# Altium PCB PCB_proj_module_1_1.PcbDoc (part 7 of 9)
Units mm, origin at the board's own origin, x right, y up, seen from the top; angles counter-clockwise.
Board outline 413 x 280 mm, 4 copper layers (Top Layer, Signal Layer 1, Signal Layer 2, Bottom Layer), stack 0.778 mm thick; 1054 components, 639 nets, 3181 pads, 673 vias.
Unrouted connection lines stored in the file: 570.
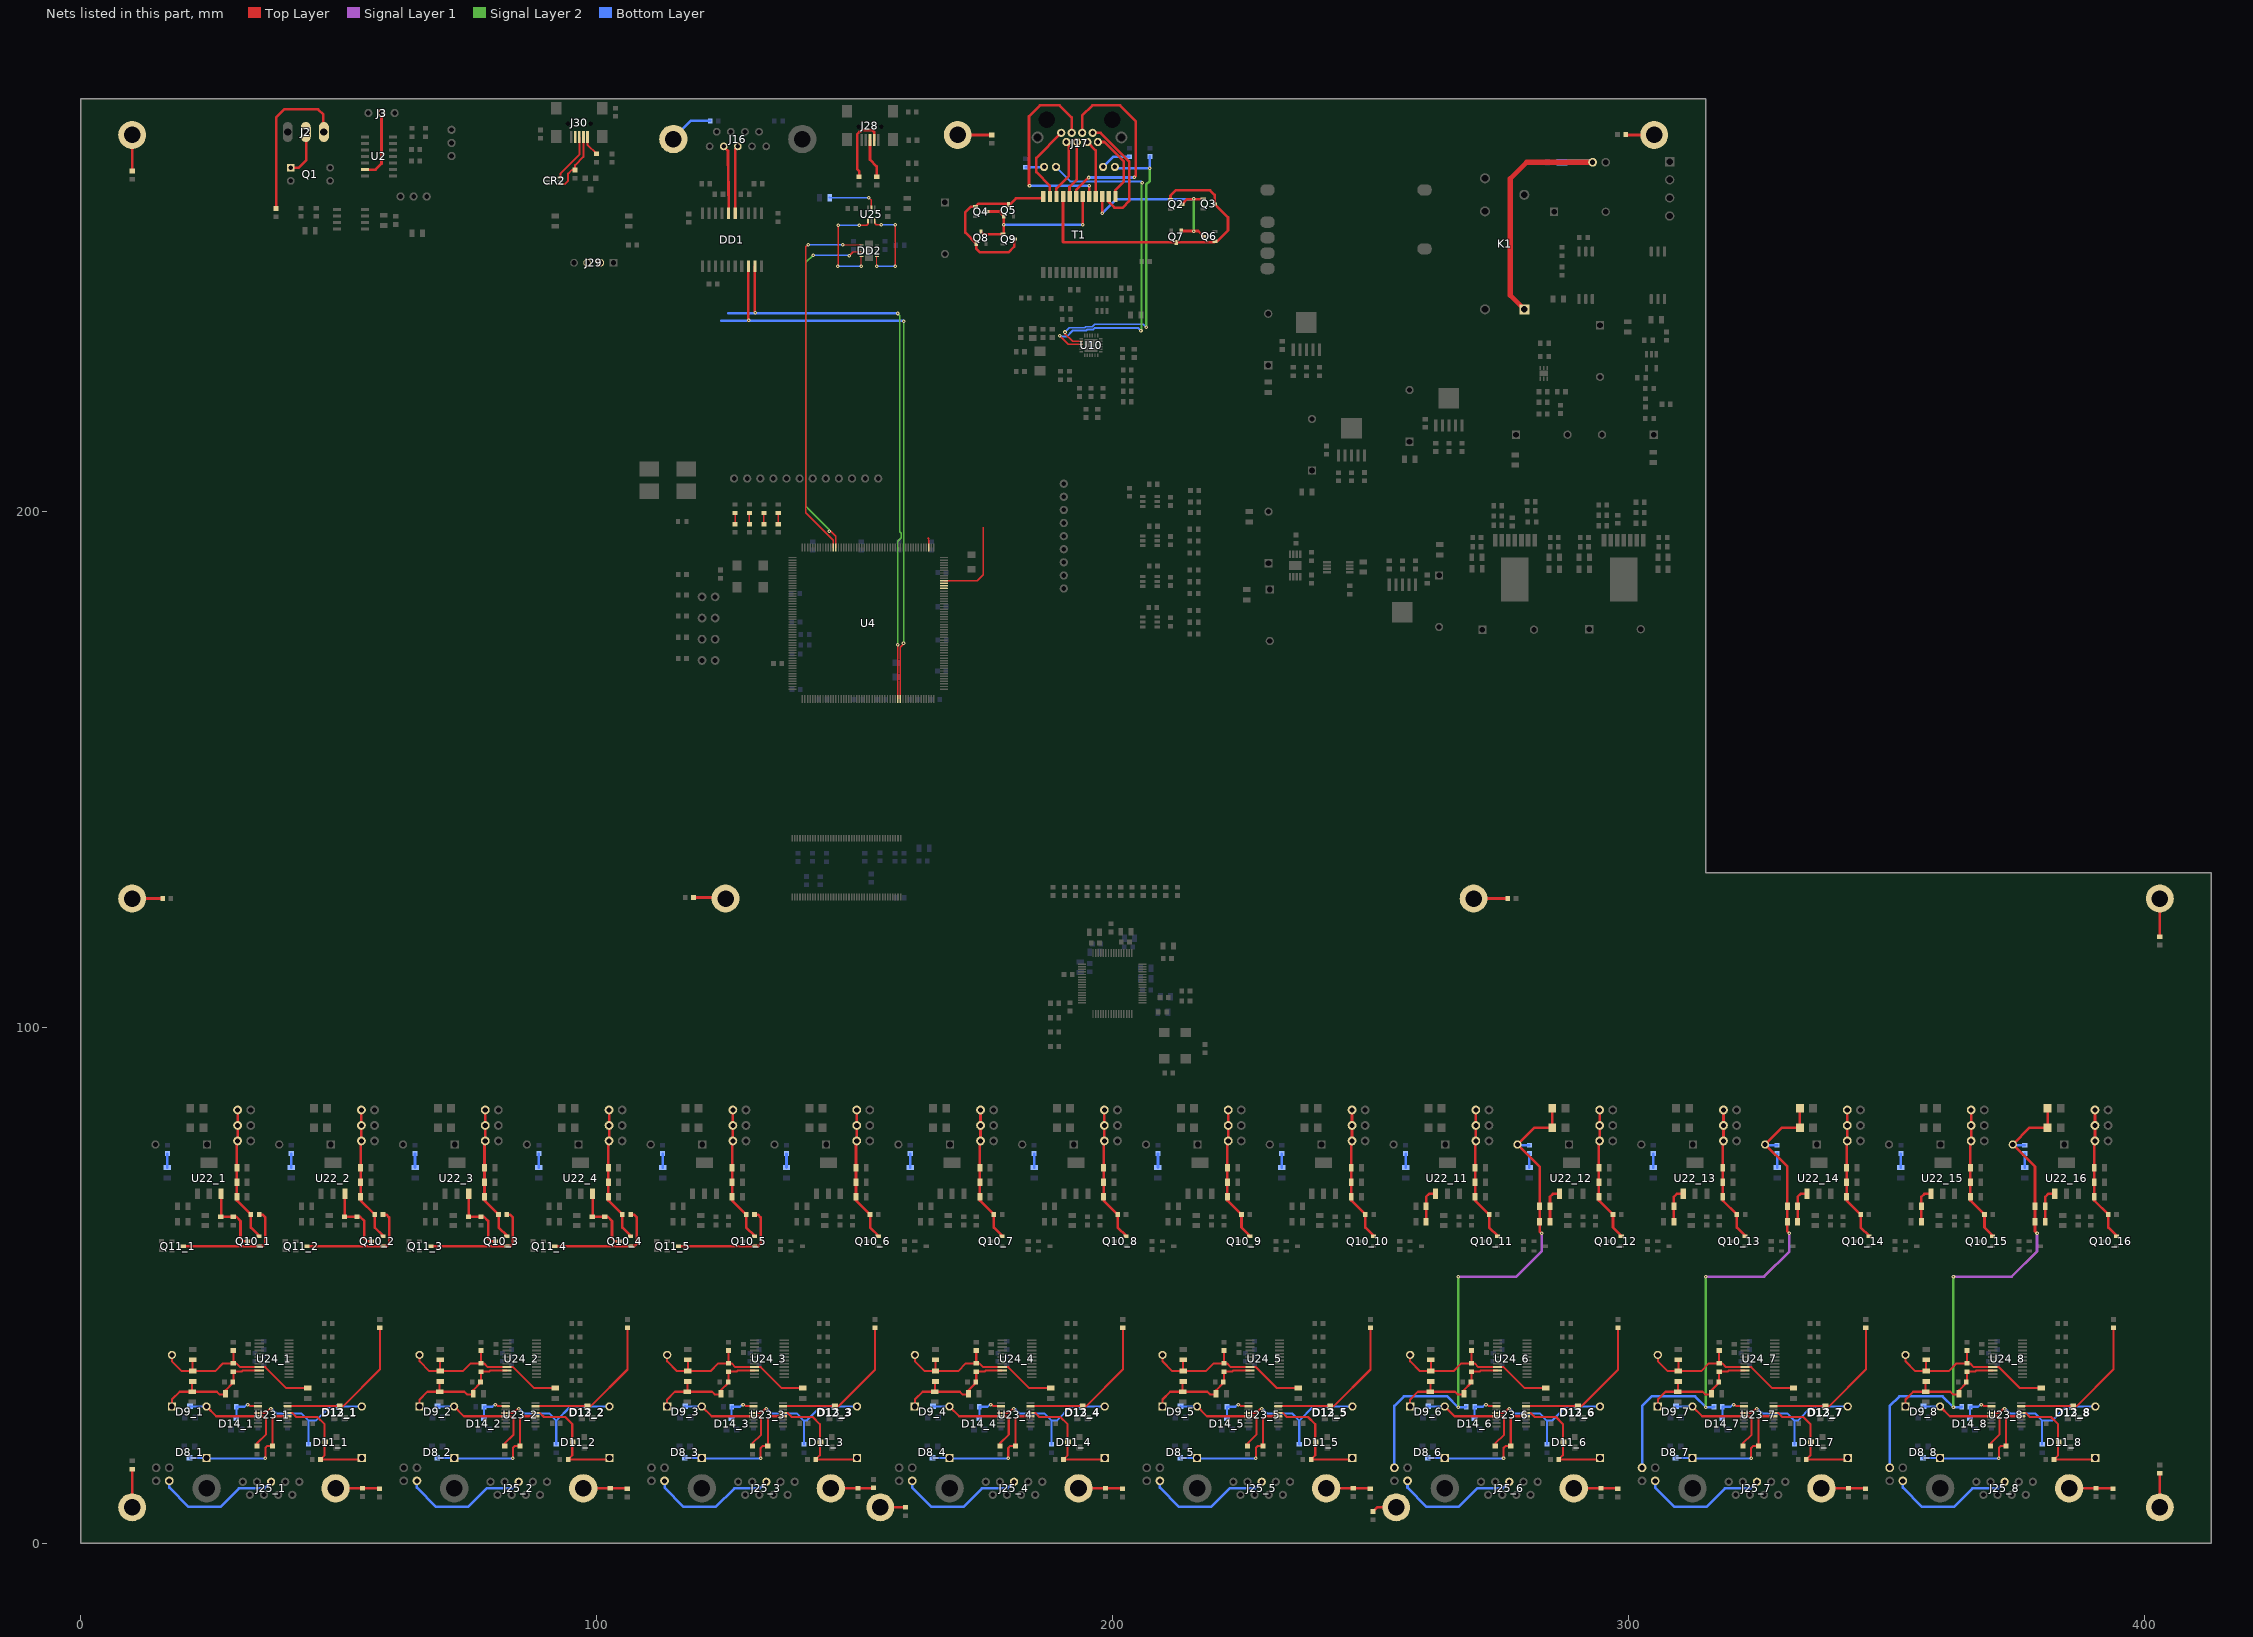
[diagram p8: the nets of this part, all layers, seen from the top]

## Via types
v1: diameter 0.7, hole 0.3, Top Layer to Bottom Layer, tented both sides, 659 vias
v2: diameter 1, hole 0.5, Top Layer to Bottom Layer, tented both sides, 12 vias
v3: diameter 0.66, hole 0.33, Top Layer to Bottom Layer, 2 vias

## Nets (pads, with @x,y where several pads share a name; then routed paths per layer and width w, separated by ;. In a path a pad name is that pad's centre, name@x,y a point inside that pad or via, vN(x,y) a via of type N, cw(c..) or ccw(c..) an arc to the next point about the centre after c; other vN are vias at no path point) (continued)
NetC148_11_2: C148_11.2 R3_11.2 U22_11.1 | length 6.9
  Top Layer w0.5: R3_11.2@260.8,62.4 C148_11.2@260.8,65.4 260.8,67.2 261.37,67.77 U22_11.1@262.63,67.77
NetC148_12_1: C148_12.1 J27_6.2 R1_12.1 R2_12.1 R3_12.1 R117_12.2 R132_6.1 TP11_12.2 | length 108
  Top Layer w0.5: v1(283.2,60.1) 282.8,60.5 R3_12.1@282.8,62.4 C148_12.1@282.8,65.4 282.8,73.02 TP11_12.2@278.5,77.32 281.764,80.584 285.123,80.584 285.25,80.711 R1_12.1@285.25,84.334
  Signal Layer 1 w0.5: v1(267,51.7) 278.3,51.7 283.2,56.6 v1(283.2,60.1)
  Signal Layer 2 w0.5: v1(267,26.4) v1(267,51.7)
  Bottom Layer w0.5: J27_6.2@254.6,14.724 J27_6.2@254.648,14.676 254.648,26.648 256.5,28.5 264.9,28.5 v1(267,26.4) 268.5,26.4 R132_6.1@268.6,26.5 ; TP11_12.2@278.5,77.32 278.65,77.17 R117_12.2@280.82,77.17
NetC148_12_2: C148_12.2 R3_12.2 U22_12.1 | length 6.9
  Top Layer w0.5: R3_12.2@284.8,62.4 C148_12.2@284.8,65.4 284.8,67.2 285.37,67.77 U22_12.1@286.63,67.77
NetC148_13_2: C148_13.2 R3_13.2 U22_13.1 | length 6.9
  Top Layer w0.5: R3_13.2@308.8,62.4 C148_13.2@308.8,65.4 308.8,67.2 309.37,67.77 U22_13.1@310.63,67.77
NetC148_14_1: C148_14.1 J27_7.2 R1_14.1 R2_14.1 R3_14.1 R117_14.2 R132_7.1 TP11_14.2 | length 108
  Top Layer w0.5: v1(331.2,60.1) 330.8,60.5 R3_14.1@330.8,62.4 C148_14.1@330.8,65.4 330.8,73.02 TP11_14.2@326.5,77.32 329.764,80.584 333.123,80.584 333.25,80.711 R1_14.1@333.25,84.334
  Signal Layer 1 w0.5: v1(315,51.7) 326.3,51.7 331.2,56.6 v1(331.2,60.1)
  Signal Layer 2 w0.5: v1(315,26.4) v1(315,51.7)
  Bottom Layer w0.5: J27_7.2@302.6,14.724 J27_7.2@302.648,14.676 302.648,26.648 304.5,28.5 312.9,28.5 v1(315,26.4) 316.5,26.4 R132_7.1@316.6,26.5 ; TP11_14.2@326.5,77.32 326.65,77.17 R117_14.2@328.82,77.17
NetC148_14_2: C148_14.2 R3_14.2 U22_14.1 | length 6.9
  Top Layer w0.5: R3_14.2@332.8,62.4 C148_14.2@332.8,65.4 332.8,67.2 333.37,67.77 U22_14.1@334.63,67.77
NetC148_15_2: C148_15.2 R3_15.2 U22_15.1 | length 6.9
  Top Layer w0.5: R3_15.2@356.8,62.4 C148_15.2@356.8,65.4 356.8,67.2 357.37,67.77 U22_15.1@358.63,67.77
NetC148_16_1: C148_16.1 J27_8.2 R1_16.1 R2_16.1 R3_16.1 R117_16.2 R132_8.1 TP11_16.2 | length 108
  Top Layer w0.5: v1(379.2,60.1) 378.8,60.5 R3_16.1@378.8,62.4 C148_16.1@378.8,65.4 378.8,73.02 TP11_16.2@374.5,77.32 377.764,80.584 381.123,80.584 381.25,80.711 R1_16.1@381.25,84.334
  Signal Layer 1 w0.5: v1(363,51.7) 374.3,51.7 379.2,56.6 v1(379.2,60.1)
  Signal Layer 2 w0.5: v1(363,26.4) v1(363,51.7)
  Bottom Layer w0.5: J27_8.2@350.6,14.724 J27_8.2@350.648,14.676 350.648,26.648 352.5,28.5 360.9,28.5 v1(363,26.4) 364.5,26.4 R132_8.1@364.6,26.5 ; TP11_16.2@374.5,77.32 374.65,77.17 R117_16.2@376.82,77.17
NetC148_16_2: C148_16.2 R3_16.2 U22_16.1 | length 6.9
  Top Layer w0.5: R3_16.2@380.8,62.4 C148_16.2@380.8,65.4 380.8,67.2 381.37,67.77 U22_16.1@382.63,67.77
NetC149_1_2: C149_1.2 R117_1.1 | length 2.7
  Bottom Layer w0.5: C149_1.2@16.82,72.87 R117_1.1@16.82,75.57
NetC149_2_2: C149_2.2 R117_2.1 | length 2.7
  Bottom Layer w0.5: C149_2.2@40.82,72.87 R117_2.1@40.82,75.57
NetC149_3_2: C149_3.2 R117_3.1 | length 2.7
  Bottom Layer w0.5: C149_3.2@64.82,72.87 R117_3.1@64.82,75.57
NetC149_4_2: C149_4.2 R117_4.1 | length 2.7
  Bottom Layer w0.5: C149_4.2@88.82,72.87 R117_4.1@88.82,75.57
NetC149_5_2: C149_5.2 R117_5.1 | length 2.7
  Bottom Layer w0.5: C149_5.2@112.82,72.87 R117_5.1@112.82,75.57
NetC149_6_2: C149_6.2 R117_6.1 | length 2.7
  Bottom Layer w0.5: C149_6.2@136.82,72.87 R117_6.1@136.82,75.57
NetC149_7_2: C149_7.2 R117_7.1 | length 2.7
  Bottom Layer w0.5: C149_7.2@160.82,72.87 R117_7.1@160.82,75.57
NetC149_8_2: C149_8.2 R117_8.1 | length 2.7
  Bottom Layer w0.5: C149_8.2@184.82,72.87 R117_8.1@184.82,75.57
NetC149_9_2: C149_9.2 R117_9.1 | length 2.7
  Bottom Layer w0.5: C149_9.2@208.82,72.87 R117_9.1@208.82,75.57
NetC149_10_2: C149_10.2 R117_10.1 | length 2.7
  Bottom Layer w0.5: C149_10.2@232.82,72.87 R117_10.1@232.82,75.57
NetC149_11_2: C149_11.2 R117_11.1 | length 2.7
  Bottom Layer w0.5: C149_11.2@256.82,72.87 R117_11.1@256.82,75.57
NetC149_12_2: C149_12.2 R117_12.1 | length 2.7
  Bottom Layer w0.5: C149_12.2@280.82,72.87 R117_12.1@280.82,75.57
NetC149_13_2: C149_13.2 R117_13.1 | length 2.7
  Bottom Layer w0.5: C149_13.2@304.82,72.87 R117_13.1@304.82,75.57
NetC149_14_2: C149_14.2 R117_14.1 | length 2.7
  Bottom Layer w0.5: C149_14.2@328.82,72.87 R117_14.1@328.82,75.57
NetC149_15_2: C149_15.2 R117_15.1 | length 2.7
  Bottom Layer w0.5: C149_15.2@352.82,72.87 R117_15.1@352.82,75.57
NetC149_16_2: C149_16.2 R117_16.1 | length 2.7
  Bottom Layer w0.5: C149_16.2@376.82,72.87 R117_16.1@376.82,75.57
NetC150_1_2: C150_1.2 J25_1.10 R120_1.2 | length 8.3
  Top Layer w0.508: J25_1.10@49.417,10.686 C150_1.2@54.382,10.686 ; C150_1.2@54.656,10.706 R120_1.2@57.95,10.706
NetC150_2_2: C150_2.2 J25_2.10 R120_2.2 | length 8.3
  Top Layer w0.508: J25_2.10@97.417,10.686 C150_2.2@102.382,10.686 ; C150_2.2@102.656,10.706 R120_2.2@105.95,10.706
NetC150_3_2: C150_3.2 J25_3.10 R120_3.2 | length 8.3
  Top Layer w0.508: J25_3.10@145.417,10.686 C150_3.2@150.382,10.686 ; C150_3.2@150.656,10.706 R120_3.2@153.95,10.706
NetC150_4_2: C150_4.2 J25_4.10 R120_4.2 | length 8.3
  Top Layer w0.508: J25_4.10@193.417,10.686 C150_4.2@198.382,10.686 ; C150_4.2@198.656,10.706 R120_4.2@201.95,10.706
NetC150_5_2: C150_5.2 J25_5.10 R120_5.2 | length 8.3
  Top Layer w0.508: J25_5.10@241.417,10.686 C150_5.2@246.382,10.686 ; C150_5.2@246.656,10.706 R120_5.2@249.95,10.706
NetC150_6_2: C150_6.2 J25_6.10 R120_6.2 | length 8.3
  Top Layer w0.508: J25_6.10@289.417,10.686 C150_6.2@294.382,10.686 ; C150_6.2@294.656,10.706 R120_6.2@297.95,10.706
NetC150_7_2: C150_7.2 J25_7.10 R120_7.2 | length 8.3
  Top Layer w0.508: J25_7.10@337.417,10.686 C150_7.2@342.382,10.686 ; C150_7.2@342.656,10.706 R120_7.2@345.95,10.706
NetC150_8_2: C150_8.2 J25_8.10 R120_8.2 | length 8.3
  Top Layer w0.508: J25_8.10@385.417,10.686 C150_8.2@390.382,10.686 ; C150_8.2@390.656,10.706 R120_8.2@393.95,10.706
NetC157_1_1: C157_1.1 C158_1.1 C159_1.2 C160_1.2 R133_1.2 TP14_1.2 U24_1.9 | length 35.6
  Top Layer w0.4: TP14_1.2@17.7,36.55 17.7,35.3 19.6,33.4 C160_1.2@21.7,33.4 ; C158_1.1@21.7,35.6 C160_1.2@21.7,33.4 ; C157_1.1@29.6,37.4 C159_1.2@29.6,34.9 ; R133_1.2@44,30.1 39.9,30.1 35.825,34.175 U24_1.9@34.63,34.175 30.925,34.175 30.2,34.9 C159_1.2@29.6,34.9 ; C160_1.2@21.7,33.4 26.1,33.4 27.6,34.9 C159_1.2@29.6,34.9
NetC157_2_1: C157_2.1 C158_2.1 C159_2.2 C160_2.2 R133_2.2 TP14_2.2 U24_2.9 | length 35.6
  Top Layer w0.4: TP14_2.2@65.7,36.55 65.7,35.3 67.6,33.4 C160_2.2@69.7,33.4 ; C158_2.1@69.7,35.6 C160_2.2@69.7,33.4 ; C157_2.1@77.6,37.4 C159_2.2@77.6,34.9 ; R133_2.2@92,30.1 87.9,30.1 83.825,34.175 U24_2.9@82.63,34.175 78.925,34.175 78.2,34.9 C159_2.2@77.6,34.9 ; C160_2.2@69.7,33.4 74.1,33.4 75.6,34.9 C159_2.2@77.6,34.9
NetC157_3_1: C157_3.1 C158_3.1 C159_3.2 C160_3.2 R133_3.2 TP14_3.2 U24_3.9 | length 35.6
  Top Layer w0.4: TP14_3.2@113.7,36.55 113.7,35.3 115.6,33.4 C160_3.2@117.7,33.4 ; C158_3.1@117.7,35.6 C160_3.2@117.7,33.4 ; C157_3.1@125.6,37.4 C159_3.2@125.6,34.9 ; R133_3.2@140,30.1 135.9,30.1 131.825,34.175 U24_3.9@130.63,34.175 126.925,34.175 126.2,34.9 C159_3.2@125.6,34.9 ; C160_3.2@117.7,33.4 122.1,33.4 123.6,34.9 C159_3.2@125.6,34.9
NetC157_4_1: C157_4.1 C158_4.1 C159_4.2 C160_4.2 R133_4.2 TP14_4.2 U24_4.9 | length 35.6
  Top Layer w0.4: TP14_4.2@161.7,36.55 161.7,35.3 163.6,33.4 C160_4.2@165.7,33.4 ; C158_4.1@165.7,35.6 C160_4.2@165.7,33.4 ; C157_4.1@173.6,37.4 C159_4.2@173.6,34.9 ; R133_4.2@188,30.1 183.9,30.1 179.825,34.175 U24_4.9@178.63,34.175 174.925,34.175 174.2,34.9 C159_4.2@173.6,34.9 ; C160_4.2@165.7,33.4 170.1,33.4 171.6,34.9 C159_4.2@173.6,34.9
NetC157_5_1: C157_5.1 C158_5.1 C159_5.2 C160_5.2 R133_5.2 TP14_5.2 U24_5.9 | length 35.6
  Top Layer w0.4: TP14_5.2@209.7,36.55 209.7,35.3 211.6,33.4 C160_5.2@213.7,33.4 ; C158_5.1@213.7,35.6 C160_5.2@213.7,33.4 ; C157_5.1@221.6,37.4 C159_5.2@221.6,34.9 ; R133_5.2@236,30.1 231.9,30.1 227.825,34.175 U24_5.9@226.63,34.175 222.925,34.175 222.2,34.9 C159_5.2@221.6,34.9 ; C160_5.2@213.7,33.4 218.1,33.4 219.6,34.9 C159_5.2@221.6,34.9
NetC157_6_1: C157_6.1 C158_6.1 C159_6.2 C160_6.2 R133_6.2 TP14_6.2 U24_6.9 | length 35.6
  Top Layer w0.4: TP14_6.2@257.7,36.55 257.7,35.3 259.6,33.4 C160_6.2@261.7,33.4 ; C158_6.1@261.7,35.6 C160_6.2@261.7,33.4 ; C157_6.1@269.6,37.4 C159_6.2@269.6,34.9 ; R133_6.2@284,30.1 279.9,30.1 275.825,34.175 U24_6.9@274.63,34.175 270.925,34.175 270.2,34.9 C159_6.2@269.6,34.9 ; C160_6.2@261.7,33.4 266.1,33.4 267.6,34.9 C159_6.2@269.6,34.9
NetC157_7_1: C157_7.1 C158_7.1 C159_7.2 C160_7.2 R133_7.2 TP14_7.2 U24_7.9 | length 35.6
  Top Layer w0.4: TP14_7.2@305.7,36.55 305.7,35.3 307.6,33.4 C160_7.2@309.7,33.4 ; C158_7.1@309.7,35.6 C160_7.2@309.7,33.4 ; C157_7.1@317.6,37.4 C159_7.2@317.6,34.9 ; R133_7.2@332,30.1 327.9,30.1 323.825,34.175 U24_7.9@322.63,34.175 318.925,34.175 318.2,34.9 C159_7.2@317.6,34.9 ; C160_7.2@309.7,33.4 314.1,33.4 315.6,34.9 C159_7.2@317.6,34.9
NetC157_8_1: C157_8.1 C158_8.1 C159_8.2 C160_8.2 R133_8.2 TP14_8.2 U24_8.9 | length 35.6
  Top Layer w0.4: TP14_8.2@353.7,36.55 353.7,35.3 355.6,33.4 C160_8.2@357.7,33.4 ; C158_8.1@357.7,35.6 C160_8.2@357.7,33.4 ; C157_8.1@365.6,37.4 C159_8.2@365.6,34.9 ; R133_8.2@380,30.1 375.9,30.1 371.825,34.175 U24_8.9@370.63,34.175 366.925,34.175 366.2,34.9 C159_8.2@365.6,34.9 ; C160_8.2@357.7,33.4 362.1,33.4 363.6,34.9 C159_8.2@365.6,34.9
NetC159_1_1: C159_1.1 C160_1.1 C161_1.2 C162_1.2 R134_1.2 TP14_1.1 U24_1.10 | length 24.6
  Top Layer w0.4: TP14_1.1@17.7,26.55 17.7,27.9 19.2,29.4 C162_1.2@21.6,29.4 ; C160_1.1@21.6,31.3 C162_1.2@21.6,29.4 ; R134_1.2@28.05,29.05 27.9,28.9 26.9,28.9 26.4,29.4 C162_1.2@21.6,29.4 ; R134_1.2@28.1,29 28.1,29.7 29.5,31.1 C161_1.2@29.5,31.3 ; C161_1.2@29.3,31.3 29.6,31.6 C159_1.1@29.6,33.3 31.2,33.3 31.425,33.525 U24_1.10@34.63,33.525
NetC159_2_1: C159_2.1 C160_2.1 C161_2.2 C162_2.2 R134_2.2 TP14_2.1 U24_2.10 | length 24.6
  Top Layer w0.4: TP14_2.1@65.7,26.55 65.7,27.9 67.2,29.4 C162_2.2@69.6,29.4 ; C160_2.1@69.6,31.3 C162_2.2@69.6,29.4 ; R134_2.2@76.05,29.05 75.9,28.9 74.9,28.9 74.4,29.4 C162_2.2@69.6,29.4 ; R134_2.2@76.1,29 76.1,29.7 77.5,31.1 C161_2.2@77.5,31.3 ; C161_2.2@77.3,31.3 77.6,31.6 C159_2.1@77.6,33.3 79.2,33.3 79.425,33.525 U24_2.10@82.63,33.525
NetC159_3_1: C159_3.1 C160_3.1 C161_3.2 C162_3.2 R134_3.2 TP14_3.1 U24_3.10 | length 24.6
  Top Layer w0.4: TP14_3.1@113.7,26.55 113.7,27.9 115.2,29.4 C162_3.2@117.6,29.4 ; C160_3.1@117.6,31.3 C162_3.2@117.6,29.4 ; R134_3.2@124.05,29.05 123.9,28.9 122.9,28.9 122.4,29.4 C162_3.2@117.6,29.4 ; R134_3.2@124.1,29 124.1,29.7 125.5,31.1 C161_3.2@125.5,31.3 ; C161_3.2@125.3,31.3 125.6,31.6 C159_3.1@125.6,33.3 127.2,33.3 127.425,33.525 U24_3.10@130.63,33.525
NetC159_4_1: C159_4.1 C160_4.1 C161_4.2 C162_4.2 R134_4.2 TP14_4.1 U24_4.10 | length 24.6
  Top Layer w0.4: TP14_4.1@161.7,26.55 161.7,27.9 163.2,29.4 C162_4.2@165.6,29.4 ; C160_4.1@165.6,31.3 C162_4.2@165.6,29.4 ; R134_4.2@172.05,29.05 171.9,28.9 170.9,28.9 170.4,29.4 C162_4.2@165.6,29.4 ; R134_4.2@172.1,29 172.1,29.7 173.5,31.1 C161_4.2@173.5,31.3 ; C161_4.2@173.3,31.3 173.6,31.6 C159_4.1@173.6,33.3 175.2,33.3 175.425,33.525 U24_4.10@178.63,33.525
NetC159_5_1: C159_5.1 C160_5.1 C161_5.2 C162_5.2 R134_5.2 TP14_5.1 U24_5.10 | length 24.6
  Top Layer w0.4: TP14_5.1@209.7,26.55 209.7,27.9 211.2,29.4 C162_5.2@213.6,29.4 ; C160_5.1@213.6,31.3 C162_5.2@213.6,29.4 ; R134_5.2@220.05,29.05 219.9,28.9 218.9,28.9 218.4,29.4 C162_5.2@213.6,29.4 ; R134_5.2@220.1,29 220.1,29.7 221.5,31.1 C161_5.2@221.5,31.3 ; C161_5.2@221.3,31.3 221.6,31.6 C159_5.1@221.6,33.3 223.2,33.3 223.425,33.525 U24_5.10@226.63,33.525
NetC159_6_1: C159_6.1 C160_6.1 C161_6.2 C162_6.2 R134_6.2 TP14_6.1 U24_6.10 | length 24.6
  Top Layer w0.4: TP14_6.1@257.7,26.55 257.7,27.9 259.2,29.4 C162_6.2@261.6,29.4 ; C160_6.1@261.6,31.3 C162_6.2@261.6,29.4 ; R134_6.2@268.05,29.05 267.9,28.9 266.9,28.9 266.4,29.4 C162_6.2@261.6,29.4 ; R134_6.2@268.1,29 268.1,29.7 269.5,31.1 C161_6.2@269.5,31.3 ; C161_6.2@269.3,31.3 269.6,31.6 C159_6.1@269.6,33.3 271.2,33.3 271.425,33.525 U24_6.10@274.63,33.525
NetC159_7_1: C159_7.1 C160_7.1 C161_7.2 C162_7.2 R134_7.2 TP14_7.1 U24_7.10 | length 24.6
  Top Layer w0.4: TP14_7.1@305.7,26.55 305.7,27.9 307.2,29.4 C162_7.2@309.6,29.4 ; C160_7.1@309.6,31.3 C162_7.2@309.6,29.4 ; R134_7.2@316.05,29.05 315.9,28.9 314.9,28.9 314.4,29.4 C162_7.2@309.6,29.4 ; R134_7.2@316.1,29 316.1,29.7 317.5,31.1 C161_7.2@317.5,31.3 ; C161_7.2@317.3,31.3 317.6,31.6 C159_7.1@317.6,33.3 319.2,33.3 319.425,33.525 U24_7.10@322.63,33.525
NetC159_8_1: C159_8.1 C160_8.1 C161_8.2 C162_8.2 R134_8.2 TP14_8.1 U24_8.10 | length 24.6
  Top Layer w0.4: TP14_8.1@353.7,26.55 353.7,27.9 355.2,29.4 C162_8.2@357.6,29.4 ; C160_8.1@357.6,31.3 C162_8.2@357.6,29.4 ; R134_8.2@364.05,29.05 363.9,28.9 362.9,28.9 362.4,29.4 C162_8.2@357.6,29.4 ; R134_8.2@364.1,29 364.1,29.7 365.5,31.1 C161_8.2@365.5,31.3 ; C161_8.2@365.3,31.3 365.6,31.6 C159_8.1@365.6,33.3 367.2,33.3 367.425,33.525 U24_8.10@370.63,33.525
NetCR2_1: CR2.1 U4.145
NetCR2_3: CR2.3 U4.146
NetCR2_4: CR2.4 J30.2 R111.1 | length 11.8
  Top Layer w0.35: CR2.4@93.013,263.45 93.85,263.45 94.5,264.1 94.5,265.5 95.2,266.2 R111.1@95.847,266.2
  Top Layer w0.381: R111.1@95.847,266.2 95.847,267.147 97.469,268.769 J30.2@97.469,272.578
NetCR2_6: CR2.6 J30.3 | length 9.4
  Top Layer w0.381: CR2.6@93.013,264.75 93,264.763 93,265.5 96.669,269.169 J30.3@96.669,272.578
NetD1_2: D1.2 R34.1 | length 2
  Top Layer w0.254: R34.1@135.237,197.526 D1.2@135.237,199.486
NetD2_2: D2.2 R35.1 | length 2
  Top Layer w0.254: R35.1@132.443,197.526 D2.2@132.443,199.486
NetD3_2: D3.2 R37.1 | length 2
  Top Layer w0.254: R37.1@129.649,197.526 D3.2@129.649,199.486
NetD4_2: D4.2 R38.1 | length 2
  Top Layer w0.254: R38.1@126.855,197.526 D4.2@126.855,199.486
NetD5_1: D5.1 J18.1 K1.1 | length 49.7
  Top Layer w1: K1.1@279.82,239.2 277.1,241.92 277.1,264.5 280.3,267.7 J18.1@293.06,267.7
  Bottom Layer w1: D5.1@287.105,267.7 J18.1@293.06,267.7
NetD8_1_3: D8_1.3 R118_1.2 TP13_1.1 U23_1.4 | length 26.7
  Top Layer w0.4: v1(35.8,16.5) 35.8,18.5 36.2,18.9 R118_1.2@37.2,18.9 37.2,24.1 37.75,24.65 U23_1.4@40.14,24.65
  Bottom Layer w0.4: D8_1.3@21.116,16.59 21.156,16.55 TP13_1.1@24.4,16.55 24.45,16.5 v1(35.8,16.5)
NetD8_2_3: D8_2.3 R118_2.2 TP13_2.1 U23_2.4 | length 26.7
  Top Layer w0.4: v1(83.8,16.5) 83.8,18.5 84.2,18.9 R118_2.2@85.2,18.9 85.2,24.1 85.75,24.65 U23_2.4@88.14,24.65
  Bottom Layer w0.4: D8_2.3@69.116,16.59 69.156,16.55 TP13_2.1@72.4,16.55 72.45,16.5 v1(83.8,16.5)
NetD8_3_3: D8_3.3 R118_3.2 TP13_3.1 U23_3.4 | length 26.7
  Top Layer w0.4: v1(131.8,16.5) 131.8,18.5 132.2,18.9 R118_3.2@133.2,18.9 133.2,24.1 133.75,24.65 U23_3.4@136.14,24.65
  Bottom Layer w0.4: D8_3.3@117.116,16.59 117.156,16.55 TP13_3.1@120.4,16.55 120.45,16.5 v1(131.8,16.5)
NetD8_4_3: D8_4.3 R118_4.2 TP13_4.1 U23_4.4 | length 26.7
  Top Layer w0.4: v1(179.8,16.5) 179.8,18.5 180.2,18.9 R118_4.2@181.2,18.9 181.2,24.1 181.75,24.65 U23_4.4@184.14,24.65
  Bottom Layer w0.4: D8_4.3@165.116,16.59 165.156,16.55 TP13_4.1@168.4,16.55 168.45,16.5 v1(179.8,16.5)
NetD8_5_3: D8_5.3 R118_5.2 TP13_5.1 U23_5.4 | length 26.7
  Top Layer w0.4: v1(227.8,16.5) 227.8,18.5 228.2,18.9 R118_5.2@229.2,18.9 229.2,24.1 229.75,24.65 U23_5.4@232.14,24.65
  Bottom Layer w0.4: D8_5.3@213.116,16.59 213.156,16.55 TP13_5.1@216.4,16.55 216.45,16.5 v1(227.8,16.5)
NetD8_6_3: D8_6.3 R118_6.2 TP13_6.1 U23_6.4 | length 26.7
  Top Layer w0.4: v1(275.8,16.5) 275.8,18.5 276.2,18.9 R118_6.2@277.2,18.9 277.2,24.1 277.75,24.65 U23_6.4@280.14,24.65
  Bottom Layer w0.4: D8_6.3@261.116,16.59 261.156,16.55 TP13_6.1@264.4,16.55 264.45,16.5 v1(275.8,16.5)
NetD8_7_3: D8_7.3 R118_7.2 TP13_7.1 U23_7.4 | length 26.7
  Top Layer w0.4: v1(323.8,16.5) 323.8,18.5 324.2,18.9 R118_7.2@325.2,18.9 325.2,24.1 325.75,24.65 U23_7.4@328.14,24.65
  Bottom Layer w0.4: D8_7.3@309.116,16.59 309.156,16.55 TP13_7.1@312.4,16.55 312.45,16.5 v1(323.8,16.5)
NetD8_8_3: D8_8.3 R118_8.2 TP13_8.1 U23_8.4 | length 26.7
  Top Layer w0.4: v1(371.8,16.5) 371.8,18.5 372.2,18.9 R118_8.2@373.2,18.9 373.2,24.1 373.75,24.65 U23_8.4@376.14,24.65
  Bottom Layer w0.4: D8_8.3@357.116,16.59 357.156,16.55 TP13_8.1@360.4,16.55 360.45,16.5 v1(371.8,16.5)
NetD9_1_3: D9_1.3 R119_1.2 TP13_1.2 U23_1.13 | length 21.7
  Top Layer w0.4: TP13_1.2@24.4,26.55 26.3,24.65 U23_1.13@34.4,24.65 35.45,24.65 35.9,24.2 35.9,21.1 34.2,19.4 R119_1.2@34.2,18.9
  Bottom Layer w0.4: D9_1.3@21.2,26.6 21.25,26.55 TP13_1.2@24.4,26.55
NetD9_2_3: D9_2.3 R119_2.2 TP13_2.2 U23_2.13 | length 21.7
  Top Layer w0.4: TP13_2.2@72.4,26.55 74.3,24.65 U23_2.13@82.4,24.65 83.45,24.65 83.9,24.2 83.9,21.1 82.2,19.4 R119_2.2@82.2,18.9
  Bottom Layer w0.4: D9_2.3@69.2,26.6 69.25,26.55 TP13_2.2@72.4,26.55
NetD9_3_3: D9_3.3 R119_3.2 TP13_3.2 U23_3.13 | length 21.7
  Top Layer w0.4: TP13_3.2@120.4,26.55 122.3,24.65 U23_3.13@130.4,24.65 131.45,24.65 131.9,24.2 131.9,21.1 130.2,19.4 R119_3.2@130.2,18.9
  Bottom Layer w0.4: D9_3.3@117.2,26.6 117.25,26.55 TP13_3.2@120.4,26.55
NetD9_4_3: D9_4.3 R119_4.2 TP13_4.2 U23_4.13 | length 21.7
  Top Layer w0.4: TP13_4.2@168.4,26.55 170.3,24.65 U23_4.13@178.4,24.65 179.45,24.65 179.9,24.2 179.9,21.1 178.2,19.4 R119_4.2@178.2,18.9
  Bottom Layer w0.4: D9_4.3@165.2,26.6 165.25,26.55 TP13_4.2@168.4,26.55
NetD9_5_3: D9_5.3 R119_5.2 TP13_5.2 U23_5.13 | length 21.7
  Top Layer w0.4: TP13_5.2@216.4,26.55 218.3,24.65 U23_5.13@226.4,24.65 227.45,24.65 227.9,24.2 227.9,21.1 226.2,19.4 R119_5.2@226.2,18.9
  Bottom Layer w0.4: D9_5.3@213.2,26.6 213.25,26.55 TP13_5.2@216.4,26.55
NetD9_6_3: D9_6.3 R119_6.2 TP13_6.2 U23_6.13 | length 21.7
  Top Layer w0.4: TP13_6.2@264.4,26.55 266.3,24.65 U23_6.13@274.4,24.65 275.45,24.65 275.9,24.2 275.9,21.1 274.2,19.4 R119_6.2@274.2,18.9
  Bottom Layer w0.4: D9_6.3@261.2,26.6 261.25,26.55 TP13_6.2@264.4,26.55
NetD9_7_3: D9_7.3 R119_7.2 TP13_7.2 U23_7.13 | length 21.7
  Top Layer w0.4: TP13_7.2@312.4,26.55 314.3,24.65 U23_7.13@322.4,24.65 323.45,24.65 323.9,24.2 323.9,21.1 322.2,19.4 R119_7.2@322.2,18.9
  Bottom Layer w0.4: D9_7.3@309.2,26.6 309.25,26.55 TP13_7.2@312.4,26.55
NetD9_8_3: D9_8.3 R119_8.2 TP13_8.2 U23_8.13 | length 21.7
  Top Layer w0.4: TP13_8.2@360.4,26.55 362.3,24.65 U23_8.13@370.4,24.65 371.45,24.65 371.9,24.2 371.9,21.1 370.2,19.4 R119_8.2@370.2,18.9
  Bottom Layer w0.4: D9_8.3@357.2,26.6 357.25,26.55 TP13_8.2@360.4,26.55
NetD11_1_3: D11_1.3 R128_1.2 TP12_1.1 U23_1.5 | length 23.2
  Top Layer w0.4: U23_1.5@40.14,25.3 41.016,25.3 41.816,24.5 45.9,24.5 47.3,23.1 47.3,19.8 47.3,17.1 R128_1.2@46.5,16.3 TP12_1.1@54.5,16.3
NetD11_2_3: D11_2.3 R128_2.2 TP12_2.1 U23_2.5 | length 23.2
  Top Layer w0.4: U23_2.5@88.14,25.3 89.016,25.3 89.816,24.5 93.961,24.5 95.3,23.161 95.3,19.8 95.3,17.1 R128_2.2@94.5,16.3 TP12_2.1@102.5,16.3
NetD11_3_3: D11_3.3 R128_3.2 TP12_3.1 U23_3.5 | length 23.2
  Top Layer w0.4: U23_3.5@136.14,25.3 137.016,25.3 137.816,24.5 141.9,24.5 143.3,23.1 143.3,19.8 143.3,17.1 R128_3.2@142.5,16.3 TP12_3.1@150.5,16.3
NetD11_4_3: D11_4.3 R128_4.2 TP12_4.1 U23_4.5 | length 23.2
  Top Layer w0.4: U23_4.5@184.14,25.3 185.016,25.3 185.816,24.5 189.9,24.5 191.3,23.1 191.3,19.8 191.3,17.1 R128_4.2@190.5,16.3 TP12_4.1@198.5,16.3
NetD11_5_3: D11_5.3 R128_5.2 TP12_5.1 U23_5.5 | length 23.2
  Top Layer w0.4: U23_5.5@232.14,25.3 233.016,25.3 233.816,24.5 237.9,24.5 239.3,23.1 239.3,19.8 239.3,17.1 R128_5.2@238.5,16.3 TP12_5.1@246.5,16.3
NetD11_6_3: D11_6.3 R128_6.2 TP12_6.1 U23_6.5 | length 23.2
  Top Layer w0.4: U23_6.5@280.14,25.3 281.016,25.3 281.816,24.5 285.961,24.5 287.3,23.161 287.3,19.8 287.3,17.1 R128_6.2@286.5,16.3 TP12_6.1@294.5,16.3
NetD11_7_3: D11_7.3 R128_7.2 TP12_7.1 U23_7.5 | length 23.2
  Top Layer w0.4: U23_7.5@328.14,25.3 329.016,25.3 329.816,24.5 333.9,24.5 335.3,23.1 335.3,19.8 335.3,17.1 R128_7.2@334.5,16.3 TP12_7.1@342.5,16.3
NetD11_8_3: D11_8.3 R128_8.2 TP12_8.1 U23_8.5 | length 23.2
  Top Layer w0.4: U23_8.5@376.14,25.3 377.016,25.3 377.816,24.5 381.9,24.5 383.3,23.1 383.3,19.8 383.3,17.1 R128_8.2@382.5,16.3 TP12_8.1@390.5,16.3
NetD12_1_3: D12_1.3 R130_1.2 TP12_1.2 U23_1.12 | length 27.1
  Top Layer w0.4: U23_1.12@34.4,25.3 35.9,25.3 36.7,26.1 v1(36.9,26.1)
  Bottom Layer w0.4: v1(36.9,26.1) 37.1,26.1 38,25.2 42.8,25.2 44.2,23.8 ; R130_1.2@44.2,19.2 44.2,23.8 ; TP12_1.2@54.5,26.55 48.35,26.55 45.6,23.8 44.2,23.8
NetD12_2_3: D12_2.3 R130_2.2 TP12_2.2 U23_2.12 | length 27.1
  Top Layer w0.4: U23_2.12@82.4,25.3 83.9,25.3 84.7,26.1 v1(84.9,26.1)
  Bottom Layer w0.4: v1(84.9,26.1) 85.1,26.1 86,25.2 90.8,25.2 92.2,23.8 ; R130_2.2@92.2,19.2 92.2,23.8 ; TP12_2.2@102.5,26.55 94.95,26.55 92.2,23.8
NetD12_3_3: D12_3.3 R130_3.2 TP12_3.2 U23_3.12 | length 27.1
  Top Layer w0.4: U23_3.12@130.4,25.3 131.9,25.3 132.7,26.1 v1(132.9,26.1)
  Bottom Layer w0.4: v1(132.9,26.1) 133.1,26.1 134,25.2 138.8,25.2 140.2,23.8 ; R130_3.2@140.2,19.2 140.2,23.8 ; TP12_3.2@150.5,26.55 143.45,26.55 140.7,23.8 140.2,23.8
NetD12_4_3: D12_4.3 R130_4.2 TP12_4.2 U23_4.12 | length 27.1
  Top Layer w0.4: U23_4.12@178.4,25.3 179.9,25.3 180.7,26.1 v1(180.9,26.1)
  Bottom Layer w0.4: v1(180.9,26.1) 181.1,26.1 182,25.2 186.8,25.2 188.2,23.8 ; R130_4.2@188.2,19.2 188.2,23.8 ; TP12_4.2@198.5,26.55 191.95,26.55 189.2,23.8 188.2,23.8
NetD12_5_3: D12_5.3 R130_5.2 TP12_5.2 U23_5.12 | length 27.1
  Top Layer w0.4: U23_5.12@226.4,25.3 227.9,25.3 228.7,26.1 v1(228.9,26.1)
  Bottom Layer w0.4: v1(228.9,26.1) 229.1,26.1 230,25.2 234.8,25.2 236.2,23.8 ; R130_5.2@236.2,19.2 236.2,23.8 ; TP12_5.2@246.5,26.55 238.95,26.55 236.2,23.8
NetD12_6_3: D12_6.3 R130_6.2 TP12_6.2 U23_6.12 | length 27.1
  Top Layer w0.4: U23_6.12@274.4,25.3 275.9,25.3 276.7,26.1 v1(276.9,26.1)
  Bottom Layer w0.4: v1(276.9,26.1) 277.1,26.1 278,25.2 282.8,25.2 284.2,23.8 ; R130_6.2@284.2,19.2 284.2,23.8 ; TP12_6.2@294.5,26.55 287.95,26.55 285.2,23.8 284.2,23.8
NetD12_7_3: D12_7.3 R130_7.2 TP12_7.2 U23_7.12 | length 27.1
  Top Layer w0.4: U23_7.12@322.4,25.3 323.9,25.3 324.7,26.1 v1(324.9,26.1)
  Bottom Layer w0.4: v1(324.9,26.1) 325.1,26.1 326,25.2 330.8,25.2 332.2,23.8 ; R130_7.2@332.2,19.2 332.2,23.8 ; TP12_7.2@342.5,26.55 335.542,26.55 332.792,23.8 332.2,23.8
NetD12_8_3: D12_8.3 R130_8.2 TP12_8.2 U23_8.12 | length 27.1
  Top Layer w0.4: U23_8.12@370.4,25.3 371.9,25.3 372.7,26.1 v1(372.9,26.1)
  Bottom Layer w0.4: v1(372.9,26.1) 373.1,26.1 374,25.2 378.8,25.2 380.2,23.8 ; R130_8.2@380.2,19.2 380.2,23.8 ; TP12_8.2@390.5,26.55 384.85,26.55 382.1,23.8 380.2,23.8
NetD13_1_3: D13_1.3 R131_1.2 U23_1.7 | length 28.9
  Top Layer w0.4: U23_1.7@40.14,26.6 50.9,26.6 58.01,33.71 58.01,34.984 58.01,41.79 R131_1.2@58,41.8
NetD13_2_3: D13_2.3 R131_2.2 U23_2.7 | length 28.9
  Top Layer w0.4: U23_2.7@88.14,26.6 98.9,26.6 106.01,33.71 106.01,34.984 106.01,41.79 R131_2.2@106,41.8
NetD13_3_3: D13_3.3 R131_3.2 U23_3.7 | length 28.9
  Top Layer w0.4: U23_3.7@136.14,26.6 146.9,26.6 154.01,33.71 154.01,34.984 154.01,41.79 R131_3.2@154,41.8
NetD13_4_3: D13_4.3 R131_4.2 U23_4.7 | length 28.9
  Top Layer w0.4: U23_4.7@184.14,26.6 194.9,26.6 202.01,33.71 202.01,34.984 202.01,41.79 R131_4.2@202,41.8
NetD13_5_3: D13_5.3 R131_5.2 U23_5.7 | length 28.9
  Top Layer w0.4: U23_5.7@232.14,26.6 242.9,26.6 250.01,33.71 250.01,34.984 250.01,41.79 R131_5.2@250,41.8
NetD13_6_3: D13_6.3 R131_6.2 U23_6.7 | length 28.9
  Top Layer w0.4: U23_6.7@280.14,26.6 290.9,26.6 298.01,33.71 298.01,34.984 298.01,41.79 R131_6.2@298,41.8
NetD13_7_3: D13_7.3 R131_7.2 U23_7.7 | length 28.9
  Top Layer w0.4: U23_7.7@328.14,26.6 338.9,26.6 346.01,33.71 346.01,34.984 346.01,41.79 R131_7.2@346,41.8
NetD13_8_3: D13_8.3 R131_8.2 U23_8.7 | length 28.9
  Top Layer w0.4: U23_8.7@376.14,26.6 386.9,26.6 394.01,33.71 394.01,34.984 394.01,41.79 R131_8.2@394,41.8
NetD14_1_3: D14_1.3 R132_1.2 U23_1.10 | length 6.6
  Top Layer w0.4: v1(32.4,26.9) 32.6,26.9 32.9,26.6 U23_1.10@34.4,26.6
  Bottom Layer w0.4: D14_1.3@30.2,24.4 R132_1.2@30.2,26.5 31.8,26.5 32.2,26.9 v1(32.4,26.9)
NetD14_2_3: D14_2.3 R132_2.2 U23_2.10 | length 6.6
  Top Layer w0.4: v1(80.4,26.9) 80.6,26.9 80.9,26.6 U23_2.10@82.4,26.6
  Bottom Layer w0.4: D14_2.3@78.2,24.4 R132_2.2@78.2,26.5 79.8,26.5 80.2,26.9 v1(80.4,26.9)
NetD14_3_3: D14_3.3 R132_3.2 U23_3.10 | length 6.6
  Top Layer w0.4: v1(128.4,26.9) 128.6,26.9 128.9,26.6 U23_3.10@130.4,26.6
  Bottom Layer w0.4: D14_3.3@126.2,24.4 R132_3.2@126.2,26.5 127.8,26.5 128.2,26.9 v1(128.4,26.9)
NetD14_4_3: D14_4.3 R132_4.2 U23_4.10 | length 6.6
  Top Layer w0.4: v1(176.4,26.9) 176.6,26.9 176.9,26.6 U23_4.10@178.4,26.6
  Bottom Layer w0.4: D14_4.3@174.2,24.4 R132_4.2@174.2,26.5 175.8,26.5 176.2,26.9 v1(176.4,26.9)
NetD14_5_3: D14_5.3 R132_5.2 U23_5.10 | length 6.6
  Top Layer w0.4: v1(224.4,26.9) 224.6,26.9 224.9,26.6 U23_5.10@226.4,26.6
  Bottom Layer w0.4: D14_5.3@222.2,24.4 R132_5.2@222.2,26.5 223.8,26.5 224.2,26.9 v1(224.4,26.9)
NetD14_6_3: D14_6.3 R132_6.2 U23_6.10 | length 6.6
  Top Layer w0.4: v1(272.4,26.9) 272.6,26.9 272.9,26.6 U23_6.10@274.4,26.6
  Bottom Layer w0.4: D14_6.3@270.2,24.4 R132_6.2@270.2,26.5 271.8,26.5 272.2,26.9 v1(272.4,26.9)
NetD14_7_3: D14_7.3 R132_7.2 U23_7.10 | length 6.6
  Top Layer w0.4: v1(320.4,26.9) 320.6,26.9 320.9,26.6 U23_7.10@322.4,26.6
  Bottom Layer w0.4: D14_7.3@318.2,24.4 R132_7.2@318.2,26.5 319.8,26.5 320.2,26.9 v1(320.4,26.9)
NetD14_8_3: D14_8.3 R132_8.2 U23_8.10 | length 6.6
  Top Layer w0.4: v1(368.4,26.9) 368.6,26.9 368.9,26.6 U23_8.10@370.4,26.6
  Bottom Layer w0.4: D14_8.3@366.2,24.4 R132_8.2@366.2,26.5 367.8,26.5 368.2,26.9 v1(368.4,26.9)
NetDD1_8: DD1.8 U4.91 | length 119.7
  Top Layer w0.254: U4.91@158.9,163.675 158.9,173.743 159.657,174.5 v1(159.5,174.5)
  Top Layer w0.5: DD1.8@129.421,247.531 129.421,237.021 v1(129.5,237.1)
  Signal Layer 2 w0.254: v1(159.5,174.5) 159.531,174.531 159.531,236.869 v1@159.5,236.9
  Bottom Layer w0.5: 124.2,237 159.443,237 v1(159.543,236.9)
NetDD1_9: DD1.9 U4.90 | length 117.5
  Top Layer w0.254: v1@158.2,174.4 v1(158.4,174.2) U4.90@158.4,163.675
  Top Layer w0.5: DD1.9@130.691,247.531 130.691,238.609 v1(130.8,238.5)
  Signal Layer 2 w0.254: v1(158.4,174.2) 158.4,194.268 158.68,194.548 159.077,194.945 159.077,195.823 158.8,196.1 158.8,238 v1(158.4,238.4)
  Bottom Layer w0.5: 125.5,238.4 v1(158.4,238.4)
NetDD1_15: DD1.15 J16.3 | length 12.8
  Top Layer w0.508: DD1.15@126.881,258.2 126.881,270.282 J16.3@127.385,270.786
NetDD1_16: DD1.16 J16.2 | length 13
  Top Layer w0.508: J16.2@124.549,270.853 125.486,269.916 DD1.16@125.621,258.2
NetDD2_1: DD2.1 U25.3 | length 18
  Top Layer w0.2: v1(154.335,247.576) DD2.1@154.335,249.422
  Top Layer w0.254: U25.3@153.923,256.379 153.923,255.862 154.177,255.608 v1(155.193,255.608) ; v1(157.891,247.576) v1(157.891,255.608)
  Bottom Layer w0.254: v1(154.335,247.576) v1(157.891,247.576) ; v1(155.193,255.608) v1(157.891,255.608)
NetDD2_7: DD2.7 U4.196 | length 71.4
  Top Layer w0.2: v1@147.728,251.672 DD2.7@151.335,251.672
  Top Layer w0.254: v1(141,251.7) 140.6,251.3 140.6,249.6 140.6,199.742 145.9,194.442 U4.196@145.9,193.025 ; v1(147.7,251.7) v1@147.728,251.672
  Bottom Layer w0.254: v1(141,251.7) v1(147.7,251.7)
NetDD2_10: DD2.10 U4.195 | length 69.7
  Top Layer w0.2: 149.722,250.322 DD2.10@151.335,250.322
  Top Layer w0.254: v1(145.1,196.2) 145.4,196.2 146.4,195.2 U4.195@146.4,193.025 ; v1(149,249.6) 149.722,250.322
  Signal Layer 2 w0.254: v1@141.8,249.7 v1(142,249.7) 140.6,248.3 140.6,201 145.1,196.5 v1(145.1,196.2)
  Bottom Layer w0.254: v1(142,249.7) 148.9,249.7 v1(149,249.6)
NetDD2_12: DD2.12 U25.1 | length 21
  Top Layer w0.2: v1(151.335,247.528) DD2.12@151.335,249.422
  Top Layer w0.254: v1(146.763,247.528) 146.875,247.64 v1(146.875,255.501) ; v1(150.95,255.501) 152.375,255.501 152.623,255.749 U25.1@152.623,256.379
  Bottom Layer w0.254: v1(146.763,247.528) v1(151.335,247.528) ; v1(146.875,255.501) v1(150.95,255.501)
NetJ2_1: J2.1 R25.1 | length 31.9
  Top Layer w0.5: R25.1@37.89,258.746 37.89,276.406 39.45,277.966 46.05,277.966 47.05,276.966 47.05,273.966 47.25,273.766 J2.1@47.25,273.066
NetJ2_2: J2.2 Q1.1 | length 9.8
  Top Layer w0.5: Q1.1@40.74,266.636 42.22,266.636 43.75,268.166 J2.2@43.75,274.366
NetJ3_2: J3.2 U2.6 | length 13.5
  Top Layer w0.5: U2.6@55.105,266.284 57.168,266.284 58.325,267.441 J3.2@58.325,277.241
NetJ16_10: J16.10 С1.1 | length 8.7
  Bottom Layer w0.508: J16.10@114.794,272.276 118.248,275.73 С1.1@122.017,275.73
NetJ17_1: J17.1 T1.23 | length 15.3
  Top Layer w0.508: T1.23@187.868,261.214 187.868,263.145 185.235,265.778 185.235,268.574 J17.1@190.061,273.4
NetJ17_2: J17.2 T1.22 | length 11.6
  Top Layer w0.508: T1.22@189.138,261.214 189.138,262.607 191.547,265.016 191.547,271.15 J17.2@191.077,271.62
NetJ17_3: J17.3 T1.17 | length 40.3
  Top Layer w0.508: v1(183.927,263.145) 183.825,263.247 183.825,276.598 185.959,278.732 189.769,278.732 192.093,276.408 J17.3@192.093,273.4 ; T1.17@195.488,261.214 v1(195.488,263.145)
  Bottom Layer w0.508: v1(183.927,263.145) v1(195.488,263.145) ; J17.3@191.911,273.4 J17.3@192.093,273.4
NetJ17_4: J17.4 T1.20 | length 11.4
  Top Layer w0.508: T1.20@191.678,261.214 191.678,262.949 193.109,264.38 J17.4@193.109,271.62 J17.4@192.817,271.328
NetJ17_5: J17.5 T1.19 | length 40.3
  Top Layer w0.508: T1.19@192.948,261.214 192.948,262.315 v1(195.376,264.743) ; J17.5@194.125,273.4 194.125,276.738 196.119,278.732 201.453,278.732 204.501,275.684 204.501,265.016 v1(204.247,264.762)
  Bottom Layer w0.508: J17.5@194.125,273.4 J17.5@194.125,273.478 ; v1(195.376,264.743) 204.228,264.743 v1(204.247,264.762)
NetJ17_6: J17.6 T1.16 | length 11.1
  Top Layer w0.508: J17.6@195.141,271.62 196.758,270.003 T1.16@196.758,261.214
NetJ17_7: J17.7 T1.14 | length 23.2
  Top Layer w0.508: J17.7@196.157,273.4 196.155,273.398 197.678,273.398 203.231,267.845 203.231,260.152 201.999,258.92 200.368,258.92 199.298,259.99 T1.14@199.298,261.214
NetJ17_8: J17.8 T1.13 | length 13.9
  Top Layer w0.508: J17.8@197.173,271.62 198.455,271.62 202.215,267.86 202.215,263.962 200.568,262.315 T1.13@200.568,261.214
NetJ17_9: J17.9 R74.2 | length 3.6
  Bottom Layer w0.508: R74.2@183.203,266.756 186.709,266.756 J17.9@186.753,266.8
NetJ17_10: J17.10 U10.3 | length 68.4
  Top Layer w0.254: v1(189.8,234.1) 191.426,232.474 U10.3@193.969,232.474
  Signal Layer 2 w0.381: v1(205.525,235.05) 205.629,235.154 205.629,263.605 v1(205.771,263.746)
  Bottom Layer w0.381: J17.10@189.043,266.8 191.843,264 191.869,263.974 205.543,263.974 v1(205.771,263.746) ; v1(189.8,234.1) 190,233.9 191.1,233.9 192.252,235.052 194.901,235.058 195.148,235.305 196.295,235.305 196.612,235.623 204.952,235.623 v1(205.525,235.05)
NetJ17_11: J17.11 R72.2 | length 5.9
  Bottom Layer w0.508: J17.11@198.183,266.8 200.171,268.788 R72.2@203.269,268.788
NetJ17_12: J17.12 R73.2 U10.2 | length 60.9
  Top Layer w0.254: v1(190.8,234.8) 190.8,234.5 192.326,232.974 U10.2@193.969,232.974
  Signal Layer 2 w0.5: v1(206.525,235.75) 206.525,263.369 207.25,264.094 v1(207.25,266.55)
  Bottom Layer w0.254: v1(190.8,234.8) 191.646,235.646 194.654,235.654 194.823,235.823 196.08,235.823 196.557,236.3 205.975,236.3 v1(206.525,235.75)
  Bottom Layer w0.5: J17.12@200.473,266.8 200.723,266.55 v1(207.25,266.55) R73.2@207.25,268.825
NetJ21_1_2: J21_1.2 J22_1.2 J24_1.2 L19_1.1 L20_1.1 L21_1.1 Q10_1.2 R114_1.1 | length 26.4
  Top Layer w0.5: J22_1.2@30.288,77.954 L20_1.1@30.288,72.814 L19_1.1@30.288,70.02 L21_1.1@30.288,67.226 30.288,66.472 R114_1.1@33.014,63.746 33.014,61.236 Q10_1.2@34.7,59.55 ; J22_1.2@30.43,78.096 J21_1.2@30.43,81.02 J24_1.2@30.43,84.02
  Top Layer w0.508: J22_1.2@30.288,77.954 30.43,78.096 J22_1.2@30.43,78.02
NetJ21_2_2: J21_2.2 J22_2.2 J24_2.2 L19_2.1 L20_2.1 L21_2.1 Q10_2.2 R114_2.1 | length 26.4
  Top Layer w0.5: J22_2.2@54.288,77.954 L20_2.1@54.288,72.814 L19_2.1@54.288,70.02 L21_2.1@54.288,67.226 54.288,66.472 R114_2.1@57.014,63.746 57.014,61.236 Q10_2.2@58.7,59.55 ; J22_2.2@54.43,78.096 J21_2.2@54.43,81.02 J24_2.2@54.43,84.02
  Top Layer w0.508: J22_2.2@54.288,77.954 54.43,78.096 J22_2.2@54.43,78.02
NetJ21_3_2: J21_3.2 J22_3.2 J24_3.2 L19_3.1 L20_3.1 L21_3.1 Q10_3.2 R114_3.1 | length 26.4
  Top Layer w0.5: J22_3.2@78.288,77.954 L20_3.1@78.288,72.814 L19_3.1@78.288,70.02 L21_3.1@78.288,67.226 78.288,66.472 R114_3.1@81.014,63.746 81.014,61.236 Q10_3.2@82.7,59.55 ; J22_3.2@78.43,78.096 J21_3.2@78.43,81.02 J24_3.2@78.43,84.02
  Top Layer w0.508: J22_3.2@78.288,77.954 78.43,78.096 J22_3.2@78.43,78.02
NetJ21_4_2: J21_4.2 J22_4.2 J24_4.2 L19_4.1 L20_4.1 L21_4.1 Q10_4.2 R114_4.1 | length 26.4
  Top Layer w0.5: J22_4.2@102.288,77.954 L20_4.1@102.288,72.814 L19_4.1@102.288,70.02 L21_4.1@102.288,67.226 102.288,66.472 R114_4.1@105.014,63.746 105.014,61.236 Q10_4.2@106.7,59.55 ; J22_4.2@102.43,78.096 J21_4.2@102.43,81.02 J24_4.2@102.43,84.02
  Top Layer w0.508: J22_4.2@102.288,77.954 102.43,78.096 J22_4.2@102.43,78.02
NetJ21_5_2: J21_5.2 J22_5.2 J24_5.2 L19_5.1 L20_5.1 L21_5.1 Q10_5.2 R114_5.1 | length 26.4
  Top Layer w0.5: J22_5.2@126.288,77.954 L20_5.1@126.288,72.814 L19_5.1@126.288,70.02 L21_5.1@126.288,67.226 126.288,66.472 R114_5.1@129.014,63.746 129.014,61.236 Q10_5.2@130.7,59.55 ; J22_5.2@126.43,78.096 J21_5.2@126.43,81.02 J24_5.2@126.43,84.02
  Top Layer w0.508: J22_5.2@126.288,77.954 126.43,78.096 J22_5.2@126.43,78.02
NetJ21_6_2: J21_6.2 J22_6.2 J24_6.2 L19_6.1 L20_6.1 L21_6.1 Q10_6.2 R114_6.1 | length 26.4
  Top Layer w0.5: J22_6.2@150.288,77.954 L20_6.1@150.288,72.814 L19_6.1@150.288,70.02 L21_6.1@150.288,67.226 150.288,66.472 R114_6.1@153.014,63.746 153.014,61.236 Q10_6.2@154.7,59.55 ; J22_6.2@150.43,78.096 J21_6.2@150.43,81.02 J24_6.2@150.43,84.02
  Top Layer w0.508: J22_6.2@150.288,77.954 150.43,78.096 J22_6.2@150.43,78.02
NetJ21_7_2: J21_7.2 J22_7.2 J24_7.2 L19_7.1 L20_7.1 L21_7.1 Q10_7.2 R114_7.1 | length 26.4
  Top Layer w0.5: J22_7.2@174.288,77.954 L20_7.1@174.288,72.814 L19_7.1@174.288,70.02 L21_7.1@174.288,67.226 174.288,66.472 R114_7.1@177.014,63.746 177.014,61.236 Q10_7.2@178.7,59.55 ; J22_7.2@174.43,78.096 J21_7.2@174.43,81.02 J24_7.2@174.43,84.02
  Top Layer w0.508: J22_7.2@174.288,77.954 174.43,78.096 J22_7.2@174.43,78.02
NetJ21_8_2: J21_8.2 J22_8.2 J24_8.2 L19_8.1 L20_8.1 L21_8.1 Q10_8.2 R114_8.1 | length 26.4
  Top Layer w0.5: J22_8.2@198.288,77.954 L20_8.1@198.288,72.814 L19_8.1@198.288,70.02 L21_8.1@198.288,67.226 198.288,66.472 R114_8.1@201.014,63.746 201.014,61.236 Q10_8.2@202.7,59.55 ; J22_8.2@198.43,78.096 J21_8.2@198.43,81.02 J24_8.2@198.43,84.02
  Top Layer w0.508: J22_8.2@198.288,77.954 198.43,78.096 J22_8.2@198.43,78.02
NetJ21_9_2: J21_9.2 J22_9.2 J24_9.2 L19_9.1 L20_9.1 L21_9.1 Q10_9.2 R114_9.1 | length 26.4
  Top Layer w0.5: J22_9.2@222.288,77.954 L20_9.1@222.288,72.814 L19_9.1@222.288,70.02 L21_9.1@222.288,67.226 222.288,66.472 R114_9.1@225.014,63.746 225.014,61.236 Q10_9.2@226.7,59.55 ; J22_9.2@222.43,78.096 J21_9.2@222.43,81.02 J24_9.2@222.43,84.02
  Top Layer w0.508: J22_9.2@222.288,77.954 222.43,78.096 J22_9.2@222.43,78.02
NetJ21_10_2: J21_10.2 J22_10.2 J24_10.2 L19_10.1 L20_10.1 L21_10.1 Q10_10.2 R114_10.1 | length 26.4
  Top Layer w0.5: J22_10.2@246.288,77.954 L20_10.1@246.288,72.814 L19_10.1@246.288,70.02 L21_10.1@246.288,67.226 246.288,66.472 R114_10.1@249.014,63.746 249.014,61.236 Q10_10.2@250.7,59.55 ; J22_10.2@246.43,78.096 J21_10.2@246.43,81.02 J24_10.2@246.43,84.02
  Top Layer w0.508: J22_10.2@246.288,77.954 246.43,78.096 J22_10.2@246.43,78.02
NetJ21_11_2: J21_11.2 J22_11.2 J24_11.2 L19_11.1 L20_11.1 L21_11.1 Q10_11.2 R114_11.1 | length 26.4
  Top Layer w0.5: J22_11.2@270.288,77.954 L20_11.1@270.288,72.814 L19_11.1@270.288,70.02 L21_11.1@270.288,67.226 270.288,66.472 R114_11.1@273.014,63.746 273.014,61.236 Q10_11.2@274.7,59.55 ; J22_11.2@270.43,78.096 J21_11.2@270.43,81.02 J24_11.2@270.43,84.02
  Top Layer w0.508: J22_11.2@270.288,77.954 270.43,78.096 J22_11.2@270.43,78.02
NetJ21_12_2: J21_12.2 J22_12.2 J24_12.2 L19_12.1 L20_12.1 L21_12.1 Q10_12.2 R114_12.1 | length 26.4
  Top Layer w0.5: J22_12.2@294.288,77.954 L20_12.1@294.288,72.814 L19_12.1@294.288,70.02 L21_12.1@294.288,67.226 294.288,66.472 R114_12.1@297.014,63.746 297.014,61.236 Q10_12.2@298.7,59.55 ; J22_12.2@294.43,78.096 J21_12.2@294.43,81.02 J24_12.2@294.43,84.02
  Top Layer w0.508: J22_12.2@294.288,77.954 294.43,78.096 J22_12.2@294.43,78.02
NetJ21_13_2: J21_13.2 J22_13.2 J24_13.2 L19_13.1 L20_13.1 L21_13.1 Q10_13.2 R114_13.1 | length 26.4
  Top Layer w0.5: J22_13.2@318.288,77.954 L20_13.1@318.288,72.814 L19_13.1@318.288,70.02 L21_13.1@318.288,67.226 318.288,66.472 R114_13.1@321.014,63.746 321.014,61.236 Q10_13.2@322.7,59.55 ; J22_13.2@318.43,78.096 J21_13.2@318.43,81.02 J24_13.2@318.43,84.02
  Top Layer w0.508: J22_13.2@318.288,77.954 318.43,78.096 J22_13.2@318.43,78.02
NetJ21_14_2: J21_14.2 J22_14.2 J24_14.2 L19_14.1 L20_14.1 L21_14.1 Q10_14.2 R114_14.1 | length 26.4
  Top Layer w0.5: J22_14.2@342.288,77.954 L20_14.1@342.288,72.814 L19_14.1@342.288,70.02 L21_14.1@342.288,67.226 342.288,66.472 R114_14.1@345.014,63.746 345.014,61.236 Q10_14.2@346.7,59.55 ; J22_14.2@342.43,78.096 J21_14.2@342.43,81.02 J24_14.2@342.43,84.02
  Top Layer w0.508: J22_14.2@342.288,77.954 342.43,78.096 J22_14.2@342.43,78.02
NetJ21_15_2: J21_15.2 J22_15.2 J24_15.2 L19_15.1 L20_15.1 L21_15.1 Q10_15.2 R114_15.1 | length 26.4
  Top Layer w0.5: J22_15.2@366.288,77.954 L20_15.1@366.288,72.814 L19_15.1@366.288,70.02 L21_15.1@366.288,67.226 366.288,66.472 R114_15.1@369.014,63.746 369.014,61.236 Q10_15.2@370.7,59.55 ; J22_15.2@366.43,78.096 J21_15.2@366.43,81.02 J24_15.2@366.43,84.02
  Top Layer w0.508: J22_15.2@366.288,77.954 366.43,78.096 J22_15.2@366.43,78.02
NetJ21_16_2: J21_16.2 J22_16.2 J24_16.2 L19_16.1 L20_16.1 L21_16.1 Q10_16.2 R114_16.1 | length 26.4
  Top Layer w0.5: J22_16.2@390.288,77.954 L20_16.1@390.288,72.814 L19_16.1@390.288,70.02 L21_16.1@390.288,67.226 390.288,66.472 R114_16.1@393.014,63.746 393.014,61.236 Q10_16.2@394.7,59.55 ; J22_16.2@390.43,78.096 J21_16.2@390.43,81.02 J24_16.2@390.43,84.02
  Top Layer w0.508: J22_16.2@390.288,77.954 390.43,78.096 J22_16.2@390.43,78.02
NetJ25_1_3: J25_1.3 J26_1.2 | length 24.6
  Bottom Layer w0.508: J26_1.2@17.188,12.136 17.188,10.812 20.9,7.1 27.1,7.1 30.7,10.7 35.666,10.7 J25_1.3@36.922,11.956
NetJ25_2_3: J25_2.3 J26_2.2 | length 24.6
  Bottom Layer w0.508: J26_2.2@65.188,12.136 65.188,10.812 68.9,7.1 75.1,7.1 78.7,10.7 83.666,10.7 J25_2.3@84.922,11.956
NetJ25_3_3: J25_3.3 J26_3.2 | length 24.6
  Bottom Layer w0.508: J26_3.2@113.188,12.136 113.188,10.812 116.9,7.1 123.1,7.1 126.7,10.7 131.666,10.7 J25_3.3@132.922,11.956
NetJ25_4_3: J25_4.3 J26_4.2 | length 24.6
  Bottom Layer w0.508: J26_4.2@161.188,12.136 161.188,10.812 164.9,7.1 171.1,7.1 174.7,10.7 179.666,10.7 J25_4.3@180.922,11.956
NetJ25_5_3: J25_5.3 J26_5.2 | length 24.6
  Bottom Layer w0.508: J26_5.2@209.188,12.136 209.188,10.812 212.9,7.1 219.1,7.1 222.7,10.7 227.666,10.7 J25_5.3@228.922,11.956
NetJ25_6_3: J25_6.3 J26_6.2 | length 24.6
  Bottom Layer w0.508: J26_6.2@257.188,12.136 257.188,10.812 260.9,7.1 267.1,7.1 270.7,10.7 275.666,10.7 J25_6.3@276.922,11.956
NetJ25_7_3: J25_7.3 J26_7.2 | length 24.6
  Bottom Layer w0.508: J26_7.2@305.188,12.136 305.188,10.812 308.9,7.1 315.1,7.1 318.7,10.7 323.666,10.7 J25_7.3@324.922,11.956
NetJ25_8_3: J25_8.3 J26_8.2 | length 24.6
  Bottom Layer w0.508: J26_8.2@353.188,12.136 353.188,10.812 356.9,7.1 363.1,7.1 366.7,10.7 371.666,10.7 J25_8.3@372.922,11.956
NetJ28_2: J28.2 R52.2 | length 13.7
  Top Layer w0.5: R52.2@150.867,264.908 150.9,264.941 150.9,266 150.5,266.4 150.5,273.136 150.964,273.6 151.2,273.6 151.5,273.9 153.5,273.9 153.8,273.6 J28.2@153.8,272
NetJ28_3: J28.3 R53.2 | length 7.6
  Top Layer w0.5: J28.3@153,272 153,268.2 154.3,266.9 R53.2@154.3,264.9
NetJ29_2: J29.2 U4.147 | length 17.3
  Top Layer w0.256: U4.147@167.325,186.6 173.75,186.6 174.925,187.775 174.925,197
NetJ29_3: J29.3 U4.159 | length 2
  Top Layer w0.256: 164.172,194.944 164.4,194.716 U4.159@164.4,193.025
NetJ30_1: J30.1 R110.1 | length 4
  Top Layer w0.381: J30.1@98.244,272.578 98.244,271.131 R110.1@100.038,269.337
NetJ30_4: J30.4 U4.144
NetL?_1: L?.1 U25.5 | length 9.9
  Top Layer w0.3: v1(152.8,260.8) 153.273,260.327 U25.5@153.273,258.805
  Bottom Layer w0.3: L?.1@145.1,260.9 L?.1@145.2,260.8 v1(152.8,260.8)
NetM1_1: M1.1 R82.2 | length 7
  Top Layer w0.508: R82.2@10,266 M1.1@10,273
NetM2_1: M2.1 R84.2 | length 6.6
  Top Layer w0.508: M2.1@170,273 R84.2@176.6,273
NetM3_1: M3.1 R87.2 | length 5.9
  Top Layer w0.508: M3.1@154.8,7 R87.2@159.9,7 ; M3.1@154.873,6.796 M3.1@155.673,6.796
NetM4_1: M4.1 R89.2 | length 7.4
  Top Layer w0.508: M4.1@10,7 R89.2@10,14.4
NetM5_1: M5.1 R91.2 | length 6.6
  Top Layer w0.508: M5.1@403,7 R91.2@403,13.6
NetM6_1: M6.1 R54.2 | length 6.3
  Top Layer w0.508: R54.2@118.8,125.2 124.8,125.2 M6.1@125,125
NetM7_1: M7.1 R83.2 | length 6.6
  Top Layer w0.508: M7.1@270,125 R83.2@276.6,125
NetM8_1: M8.1 R86.2 | length 7.4
  Top Layer w0.508: R86.2@403,117.6 M8.1@403,125
NetM9_1: M9.1 R88.2 | length 5.4
  Top Layer w0.508: R88.2@299.6,273 M9.1@305,273
NetM10_1: M10.1 R92.2 | length 5.9
  Top Layer w0.508: M10.1@10,125 R92.2@15.9,125
NetM11_1: M11.1 R127.2 | length 4.8
  Top Layer w0.5: R127.2@250.5,6.2 251.3,7 M11.1@255,7
NetQ2_1: Q2.1 Q3.3 Q6.1 Q7.3 T1.21 | length 60
  Top Layer w0.5: T1.21@190.408,261.214 190.408,252.267 190.5,252.175 Q7.3@212.375,252.175 219.675,252.175 Q6.1@219.875,252.375 220.275,252.375 222.4,254.5 222.4,257.025 Q3.3@219.8,259.625 219.8,261.375 218.925,262.25 212.25,262.25 211.25,261.25 Q2.1@211.25,260.5
NetQ2_3: Q2.3 Q3.1 Q6.3 Q7.1 T1.15 | length 38.2
  Top Layer w0.5: v1(198.025,257.825) 198.028,257.828 T1.15@198.028,261.214 ; Q7.1@213.45,254.5 Q7.1@213.325,254.375 216.625,254.375 Q6.3@217.675,253.325 ; Q2.3@213.45,259.55 214.475,260.575 v1@215.75,260.575 ; v1(215.75,260.65) v1@215.85,260.65 ; v1@215.85,260.575 Q3.1@217.6,260.575
  Signal Layer 2 w0.5: v1(215.725,254.325) 215.75,254.325 v1(215.75,260.65)
  Bottom Layer w0.5: v1(198.025,257.825) 200.75,260.55 215.65,260.55 v1(215.75,260.65)
NetQ4_1: Q4.1 Q5.3 Q8.1 Q9.3 T1.24 | length 34.3
  Top Layer w0.5: Q9.3@180.963,252.824 180.963,251.384 179.83,250.251 174.308,250.251 173.579,250.98 Q8.1@173.579,251.978 171.481,254.076 171.481,258.046 172.543,259.108 Q4.1@173.429,259.108 174.003,259.682 179.439,259.682 179.863,259.258 181.303,260.698 186.082,260.698 T1.24@186.598,261.214
NetQ4_3: Q4.3 Q5.1 Q8.3 Q9.1 T1.18 | length 32.7
  Top Layer w0.5: Q8.3@174.529,254.178 174.933,253.774 Q9.1@178.763,253.774 178.913,253.924 Q5.1@178.913,257.312 178.067,258.158 Q4.3@175.629,258.158 ; v1(194.218,255.594) T1.18@194.218,261.214
  Bottom Layer w0.5: v1(178.913,255.626) 178.9,255.626 178.868,255.594 v1(194.218,255.594)
NetQ10_1_1: Q10_1.1 Q11_1.3 R114_1.2 | length 22.7
  Top Layer w0.5: Q11_1.3@19.894,57.635 Q10_1.1@34.7,57.635 ; Q10_1.1@34.6,57.65 35.35,57.65 35.8,58.1 35.8,63.2 35.254,63.746 R114_1.2@34.614,63.746
NetQ10_1_3: Q10_1.3 R113_1.1 R115_1.2 U22_1.3 | length 13.7
  Top Layer w0.5: R113_1.1@27.18,63.32 30.18,63.32 31,62.5 31,59.1 31.5,58.6 Q10_1.3@32.5,58.6 ; R113_1.1@27.23,63.37 U22_1.3@27.23,67.77
  Top Layer w0.508: R113_1.1@27.18,63.32 R113_1.1@27.23,63.37
NetQ10_2_1: Q10_2.1 Q11_2.3 R114_2.2 | length 22.7
  Top Layer w0.5: Q11_2.3@43.894,57.635 Q10_2.1@58.7,57.635 ; Q10_2.1@58.6,57.65 59.35,57.65 59.8,58.1 59.8,63.2 59.254,63.746 R114_2.2@58.614,63.746
NetQ10_2_3: Q10_2.3 R113_2.1 R115_2.2 U22_2.3 | length 13.7
  Top Layer w0.5: R113_2.1@51.18,63.32 54.18,63.32 55,62.5 55,59.1 55.5,58.6 Q10_2.3@56.5,58.6 ; R113_2.1@51.23,63.37 U22_2.3@51.23,67.77
  Top Layer w0.508: R113_2.1@51.18,63.32 R113_2.1@51.23,63.37
NetQ10_3_1: Q10_3.1 Q11_3.3 R114_3.2 | length 22.7
  Top Layer w0.5: Q11_3.3@67.894,57.635 Q10_3.1@82.7,57.635 ; Q10_3.1@82.6,57.65 83.35,57.65 83.8,58.1 83.8,63.2 83.254,63.746 R114_3.2@82.614,63.746
NetQ10_3_3: Q10_3.3 R113_3.1 R115_3.2 U22_3.3 | length 13.7
  Top Layer w0.5: R113_3.1@75.18,63.32 78.18,63.32 79,62.5 79,59.1 79.5,58.6 Q10_3.3@80.5,58.6 ; R113_3.1@75.23,63.37 U22_3.3@75.23,67.77
  Top Layer w0.508: R113_3.1@75.18,63.32 R113_3.1@75.23,63.37
NetQ10_4_1: Q10_4.1 Q11_4.3 R114_4.2 | length 22.7
  Top Layer w0.5: Q11_4.3@91.894,57.635 Q10_4.1@106.7,57.635 ; Q10_4.1@106.6,57.65 107.35,57.65 107.8,58.1 107.8,63.2 107.254,63.746 R114_4.2@106.614,63.746
NetQ10_4_3: Q10_4.3 R113_4.1 R115_4.2 U22_4.3 | length 13.7
  Top Layer w0.5: R113_4.1@99.18,63.32 102.18,63.32 103,62.5 103,59.1 103.5,58.6 Q10_4.3@104.5,58.6 ; R113_4.1@99.23,63.37 U22_4.3@99.23,67.77
  Top Layer w0.508: R113_4.1@99.18,63.32 R113_4.1@99.23,63.37
NetQ10_5_1: Q10_5.1 Q11_5.3 R114_5.2 | length 22.7
  Top Layer w0.5: Q11_5.3@115.894,57.635 Q10_5.1@130.7,57.635 ; Q10_5.1@130.6,57.65 131.35,57.65 131.8,58.1 131.8,63.2 131.254,63.746 R114_5.2@130.614,63.746